# EAGLE board FM-Radio-Circuit-Mirrored (EAGLE 7.2.0)
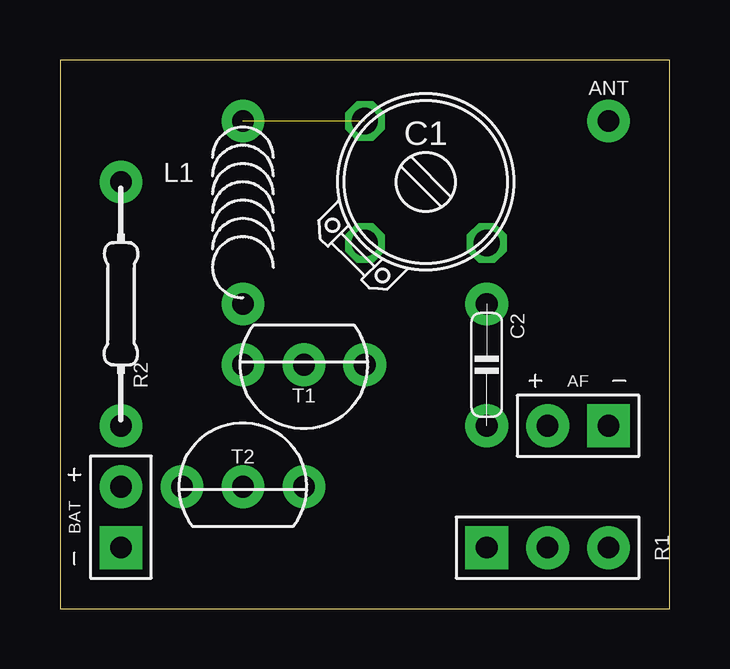
[diagram p0: board, top side]
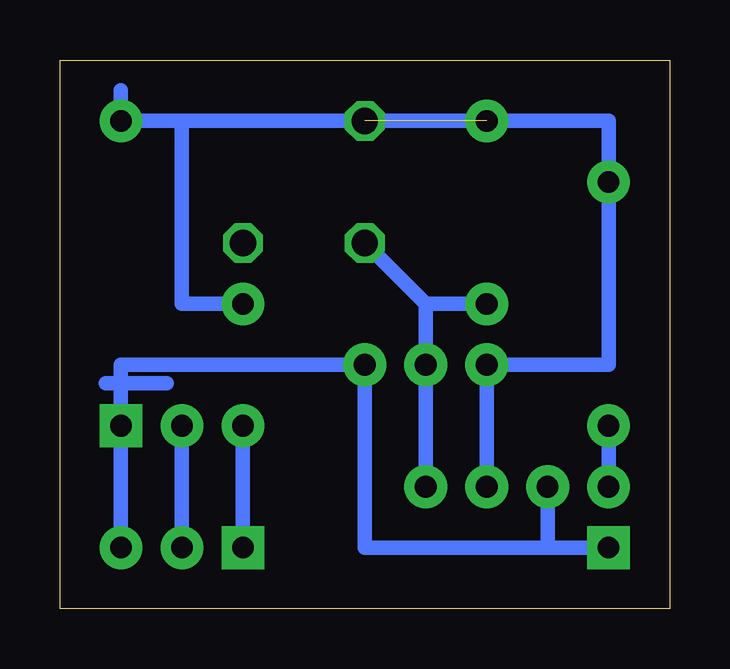
[diagram p1: board, bottom side, seen from below]

Size 25.4 x 22.86 mm. Coordinates in mm from the lower left corner, seen from the top.
Outline: 25.4,0 0,0 0,22.86 25.4,22.86
Outline: 25.4,0 25.4,22.86
Outline: 25.4,0 25.4,22.86
Copper layers (1*16): Top 0.035mm / dielectric 1.5mm / Bottom 0.035mm
Design rules "default": minimum track width 10mil, minimum drill 24mil, track to track 8mil, track to pad 8mil, pad to pad 8mil, via to via 8mil, smd to smd 8mil, copper to edge 40mil, drill to drill 8mil, minimum pad ring 10mil, minimum via ring 8mil, stop-mask expansion 4mil, vias tented up to drill 0mil, thermal gap 10mil

## Footprints (pad centres in the part's own frame; a part is rotated, then mirrored left to right if it is on the bottom)
SPAD+- = drill 0.9 pad 1.778 square: 1 0,-1.27 | drill 0.9 pad 1.778: 2 0,1.27
SPAD = drill 0.9 pad 1.778: 1 0,0
SPAD-+ = drill 0.9 pad 1.778 square: 1 0,-1.27 | drill 0.9 pad 1.778: 2 0,1.27
TRIM-2222-808 = drill 1.1 octagon: 1 -2.54,2.54; 2 -2.54,-2.54; 3 2.54,-2.54
C050-020X044 = drill 0.9 pad 1.778: 1 -2.54,0; 2 2.54,0
L-04/7-V = drill 0.9 pad 1.778: 1 0,3.81; 2 0,-3.81
CONN-3P = drill 0.9 pad 1.778 square: 1 0,-2.54 | drill 0.9 pad 1.778: 2 0,0; 3 0,2.54
0204/10 = drill 0.9 pad 1.778: 1 -5.08,0; 2 5.08,0
TO92-EBC = drill 0.9 pad 1.778: B 0,0; C 0,-2.54; E 0,2.54

## Placement (x,y rotation side)
AF  [SPAD+-]  21.59,7.62 90 top
ANT  ANT  [SPAD]  22.86,20.32 270 top
BAT  [SPAD-+]  2.54,3.81 0 top
C1  2 - 20pF  [TRIM-2222-808]  15.24,17.78 0 top
C2  220nF  [C050-020X044]  17.78,10.16 270 top
L1  200nH  [L-04/7-V]  7.62,16.51 0 top
R1  10kΩ  [CONN-3P]  20.32,2.54 270 top
R2  10kΩ  [0204/10]  2.54,12.7 270 top
T1  2N2222  [TO92-EBC]  10.16,10.16 270 top
T2  2N2222  [TO92-EBC]  7.62,5.08 90 top

## Library data of the parts
AF ANT BAT = pad
C1 = cap-trim
C2 = c
L1 = l
R1 R2 = r
T1 T2 = t

## Nets
GND: AF.1 BAT.1 R1.3 T1.E T2.E
N$1: C1.2 L1.2 T1.B T2.C
N$3: C2.2 R1.1
N$4: ANT.1 C1.1 C2.1 L1.1 R2.1 T1.C T2.B
N$6: AF.2 R1.2
VCC: BAT.2 R2.2

## Tracks (layer width: path | path; a pad name or v marks a point on that pad's centre or on a via)
GND
  Bottom 0.61: R1.3 AF.1 22.86,10.16 T1.E 12.7,2.54 5.08,2.54 | BAT.1 5.08,2.54 | T2.E 5.08,2.54 | 20.95,9.4 23.5,9.4
N$1
  Bottom 0.61: T2.C T1.B 10.16,12.7 | L1.2 10.16,12.7 | 10.16,12.7 C1.2
N$3
  Bottom 0.61: R1.1 C2.2
N$4  (1 unrouted)
  Bottom 0.61: L1.1 2.54,20.32 R2.1 2.54,10.16 T1.C T2.B | 22.86,21.59 ANT.1 20.32,20.32 | C2.1 20.32,12.7 20.32,20.32 | L1.1 20.32,20.32 | L1.1 20.32,20.32
N$6
  Bottom 0.61: AF.2 R1.2
VCC
  Bottom 0.61: BAT.2 R2.2